# EAGLE board Nano Leonardo (EAGLE 6.2)
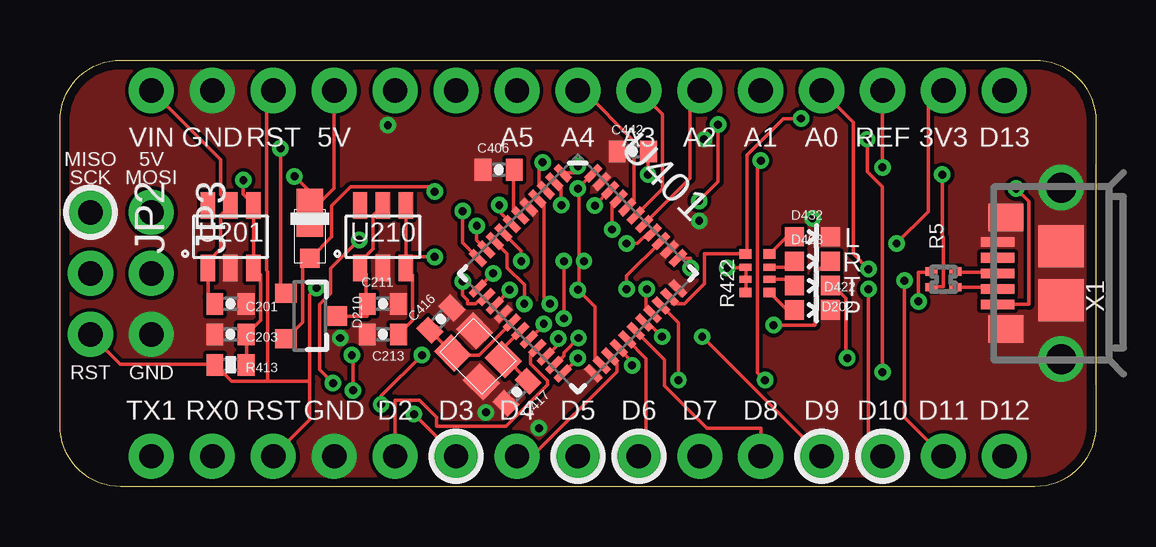
[diagram p0: board, top side]
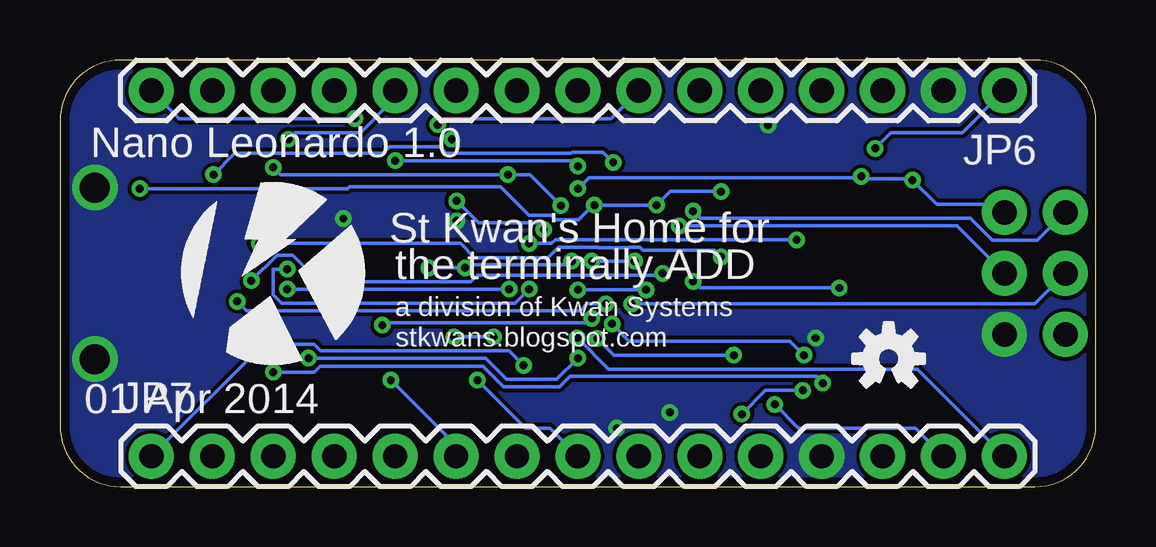
[diagram p1: board, bottom side, seen from below]

Size 43.18 x 17.78 mm. Coordinates in mm from the lower left corner, seen from the top.
Outline: 40.64,0 2.54,0 arc-90 0,2.54 0,15.24 arc-90 2.54,17.78 40.64,17.78 arc-90 43.18,15.24 43.18,2.54 arc-90 40.64,0
Copper layers (1*16): Top 0.0356mm / dielectric 1.5011mm / Bottom 0.0356mm
Design rules: minimum track width 6mil, minimum drill 13mil, track to track 6mil, track to pad 6mil, pad to pad 6mil, via to via 6mil, smd to smd 6mil, copper to edge 15mil, drill to drill 6mil, minimum pad ring 7mil, minimum via ring 7mil, stop-mask expansion 4mil, vias tented up to drill 0mil, thermal gap 10mil
Net classes: 0 default: width 0.152 mm, drill 0.33 mm, clearance 0.152 mm

## Footprints (pad centres in the part's own frame; a part is rotated, then mirrored left to right if it is on the bottom)
0402-CAP = smd 0.7 x 0.9: 1 -0.65,0; 2 0.65,0
MICROSMP = smd 0.8 x 0.8: A 0.9,0 | smd 2 x 1.1: K -1,0
LED-0603 = smd 0.8 x 0.8: A 0,-0.75; C 0,0.75
SOT-23-3 = smd 0.9 x 0.8: 1 -1,0.95; 2 -1,-0.95; 3 1.1,0
1X03_NO_SILK = drill 1.016 pad 1.88: 1 0,0; 2 2.54,0; 3 5.08,0
1X15 = drill 1.016 pad 1.88: 1 0,0; 2 2.54,0; 3 5.08,0; 4 7.62,0; 5 10.16,0; 6 12.7,0; 7 15.24,0; 8 17.78,0; 9 20.32,0; 10 22.86,0; 11 25.4,0; 12 27.94,0; 13 30.48,0; 14 33.02,0; 15 35.56,0
CRA02 = smd 0.35 x 0.5: 1 -0.325,-0.5; 2 0.325,-0.5; 3 0.325,0.5; 4 -0.325,0.5
0402-RES = smd 0.7 x 0.9: 1 -0.65,0; 2 0.65,0
CRA04 = smd 0.4 x 0.5: 1 -0.8,-0.5; 4 0.8,-0.5; 5 0.8,0.5; 8 -0.8,0.5 | smd 0.3 x 0.5: 2 -0.25,-0.5; 3 0.25,-0.5; 6 0.25,0.5; 7 -0.25,0.5
SOT-23-6 = smd 0.6 x 1.1: 1 -0.95,-1.3; 2 0,-1.3; 3 0.95,-1.3; 4 0.95,1.3; 5 0,1.3; 6 -0.95,1.3
QFN-44-NOPAD = smd 0.8 x 0.3: 1 -3.4,2.5; 2 -3.4,2; 3 -3.4,1.5; 4 -3.4,1; 5 -3.4,0.5; 6 -3.4,0; 7 -3.4,-0.5; 8 -3.4,-1; 9 -3.4,-1.5; 10 -3.4,-2; 11 -3.4,-2.5; 23 3.4,-2.5; 24 3.4,-2; 25 3.4,-1.5; 26 3.4,-1; 27 3.4,-0.5; 28 3.4,0; 29 3.4,0.5; 30 3.4,1; 31 3.4,1.5; 32 3.4,2; 33 3.4,2.5 | smd 0.3 x 0.8: 12 -2.5,-3.4; 13 -2,-3.4; 14 -1.5,-3.4; 15 -1,-3.4; 16 -0.5,-3.4; 17 0,-3.4; 18 0.5,-3.4; 19 1,-3.4; 20 1.5,-3.4; 21 2,-3.4; 22 2.5,-3.4; 34 2.5,3.4; 35 2,3.4; 36 1.5,3.4; 37 1,3.4; 38 0.5,3.4; 39 0,3.4; 40 -0.5,3.4; 41 -1,3.4; 42 -1.5,3.4; 43 -2,3.4; 44 -2.5,3.4
USB_MICROB_3075 = smd 0.4 x 1.4: 1 -1.3,4.1; 2 -0.65,4.1; 3 0,4.1; 4 0.65,4.1; 5 1.3,4.1 | smd 1.15 x 1.45: P$1 2.32,3.75; P$10 -2.32,3.75 | smd 1.75 x 1.9: P$2 1.125,1.45; P$8 -1.125,1.45 | drill 1.25 pad 1.9: P$3 -3.575,1.45; P$4 3.575,1.45
CRYSTAL_SMD_2MM_2_5MM = smd 1.2 x 1: 1 -0.85,-0.65; 2 0.85,-0.65; 3 0.85,0.65; 4 -0.85,0.65

## Placement (x,y rotation side)
C201  1uF  [0402-CAP]  7.11,7.62 0 top
C203  4.7uF  [0402-CAP]  7.11,6.35 180 top
C211  1uF  [0402-CAP]  13.46,7.62 0 top
C213  4.7uF  [0402-CAP]  13.46,6.35 180 top
C406  100nF  [0402-CAP]  18.29,13.21 0 top
C416  22pF  [0402-CAP]  15.88,6.99 45 top
C417  22pF  [0402-CAP]  19.05,3.94 225 top
C442  100nF  [0402-CAP]  23.88,13.97 0 top
D201  MSS1P6  [MICROSMP]  10.41,10.41 270 top
D202  GREEN  [LED-0603]  31.37,7.37 270 top
D210  DCC  [SOT-23-3]  10.41,7.11 0 top
D408  RED  [LED-0603]  31.37,9.4 270 top
D422  BLUE  [LED-0603]  31.37,8.38 270 top
D432  AMBER  [LED-0603]  31.37,10.41 270 top
JP2  [1X03_NO_SILK]  1.27,11.43 270 top
JP3  [1X03_NO_SILK]  3.81,11.43 270 top
JP6  [1X15]  3.81,16.51 180 bottom
JP7  [1X15]  39.37,1.27 0 bottom
R5  22  [CRA02]  36.83,8.64 90 top
R413  10K  [0402-RES]  7.11,5.08 0 top
R422  680  [CRA04]  29.08,8.89 90 top
U201  5V  [SOT-23-6]  7.11,10.41 0 top
U210  3.3V  [SOT-23-6]  13.46,10.41 0 top
U401  ATMEGA32U4  [QFN-44-NOPAD]  21.59,8.89 315 top
U$1  [KWAN_CIRCLE]  34.29,8.89 0 bottom
U$3  OSHW-LOGOS  [OSHW-LOGO-S]  8.64,5.33 0 bottom
X1  USB_MICROB_JSTGCT  [USB_MICROB_3075]  43.18,8.89 90 top
Y1  16MHz  [CRYSTAL_SMD_2MM_2_5MM]  17.42,5.44 135 top

## Library data of the parts
C201 C211 = SparkFun; DIGIKEY: 445-1415-1-ND
C203 C213 = SparkFun; DIGIKEY: 445-7395-1-ND
C406 C416 C417 C442 R413 U$3 = SparkFun
D201 = KwanSystems; DIGIKEY: MSS1P6-M3/89AGICT-ND
D202 = SparkFun; LED_COLOR_3D50: Green; LED_TRANS_3D50: 0.500000
D210 X1 = KwanSystems; LOGO_3D50: NOLOGO
D408 = SparkFun; LED_COLOR_3D50: Red; LED_TRANS_3D50: 0.500000
D422 = SparkFun; LED_COLOR_3D50: Blue; LED_TRANS_3D50: 0.500000
D432 = SparkFun; LED_COLOR_3D50: Yellow; LED_TRANS_3D50: 0.500000
JP2 JP3 = SparkFun-Connectors; HEADER_INVERT_3D50: 1; HEADER_TYPE_3D50: 1
JP6 JP7 = SparkFun-Connectors; HEADER_INVERT_3D50: 0; HEADER_TYPE_3D50: 1
R5 R422 U$1 Y1 = KwanSystems
U201 U210 = KwanSystems; DIGIKEY: MAX8881EUT50+TCT-ND
U401 = SparkFun; LOGO_3D50: NOLOGO

## Nets
3V3: C213.1 JP6.14 U210.3 U210.4
A0: JP6.12 U401.36
A1: JP6.11 U401.37
A2: JP6.10 U401.38
A3: JP6.9 U401.39
A4: JP6.8 U401.40
A5: JP6.7 U401.41
AREF: C442.2 JP6.13 U401.42
D2: JP7.11 U401.19
D3: JP7.10 U401.18
D4: JP7.9 U401.25
D5: JP7.8 U401.31
D6: JP7.7 U401.27
D7: JP7.6 U401.1
D8: JP7.5 U401.28
D9: JP7.4 U401.29
D10: JP7.3 U401.30
D11: JP7.2 U401.12
D12: JP7.1 U401.26
D13: JP6.15 R422.5 U401.32
D17: D408.C U401.8
D+: R5.3 U401.4
D-: R5.4 U401.3
GND [vcc]: C201.2 C203.2 C211.2 C213.2 C406.1 C416.2 C417.2 C442.1 D202.C D432.C JP3.3 JP6.2 JP7.12 U201.2 U210.2 U401.5 U401.15 U401.23 U401.33 U401.35 U401.43 X1.5 X1.P$1 X1.P$2 X1.P$3 X1.P$4 X1.P$8 X1.P$10 Y1.2 Y1.4
MISO: JP2.1 U401.11
MOSI: JP3.2 U401.10
N$1: D422.A R422.2
N$2: D408.A R422.3
N$3: D432.A R422.4
N$4: C406.2 U401.6
N$6: R5.1 X1.2
N$8: R5.2 X1.3
N$38: D202.A R422.1
RESET: JP2.3 JP6.3 JP7.13 R413.1 U401.13
RXI: JP7.14 U401.20
SCK: JP2.2 U401.9
TXLED: D422.C U401.22
TXO: JP7.15 U401.21
V3.3SUPPLY: C211.1 D210.3 U210.1 U210.5
VBUS: D201.A D210.2 U401.2 U401.7 X1.1
VCC: C203.1 D201.K JP3.1 JP6.4 R413.2 R422.6 R422.7 R422.8 U201.3 U201.4 U401.14 U401.24 U401.34 U401.44
VIN: C201.1 D210.1 JP6.1 U201.1 U201.5
XTAL1: C417.1 U401.17 Y1.1
XTAL2: C416.1 U401.16 Y1.3

## Tracks (layer width: path | path; a pad name or v marks a point on that pad's centre or on a via)
3V3  (via drill 0.33)
  Top 0.152: C213.1 14.12,6.35 14.71,6.93 14.71,8.81 14.43,9.09 U210.3 | U210.4 14.43,11.71 14.43,9.17 U210.3 | v15.62,9.58 14.48,9.58 U210.3 | v34.87,10.13 36.2,11.46 36.2,15.88 JP6.14
  Bottom 0.152: v15.62,9.58 15.9,9.86 18.87,9.86 19,9.98 19.46,9.98 19.48,9.96 20.75,9.96 20.78,9.98 22.4,9.98 22.84,9.55 25.91,9.55 26.49,10.13 v34.87,10.13
A0  (via drill 0.33)
  Top 0.152: v23.62,8.23 23.62,8.79 25.04,10.21 U401.36 | v33.71,9.07 33.07,9.7 33.07,15.19 JP6.12
  Bottom 0.152: v23.62,8.23 24.21,7.64 33.93,7.64 34.29,8 34.29,9.07 v33.71,9.07
A1  (via drill 0.33)
  Top 0.152: v23.62,10.13 24.08,10.13 24.51,10.57 24.69,10.57 U401.37 | v12.47,10.29 11.28,9.09 11.28,8.05 10.82,7.59 10.82,4.88 v11.38,4.32 | v34.29,4.78 34.29,12.5 33.66,13.13 v33.66,14.48
  Bottom 0.152: v23.62,10.13 22.68,10.13 22.53,10.29 v12.47,10.29 | v11.38,4.32 11.66,4.6 21.92,4.6 22.35,4.17 24.69,4.17 25.55,5.03 32.33,5.03 32.59,4.78 v34.29,4.78 | v33.66,14.48 33.38,14.76 30.66,14.76 29.21,16.2 JP6.11
A2
  Top 0.152: JP6.10 26.26,16.1 26.26,12.85 U401.38
A3
  Top 0.152: U401.39 25.12,12.42 25.12,15.52 JP6.9
A4
  Top 0.152: JP6.8 21.82,16.51 23.93,14.4 23.93,11.94 U401.40
A5  (via drill 0.33)
  Top 0.152: v23.01,10.72 23.01,11.73 23.27,11.99 U401.41 | v26.64,11.91 27.43,12.7 v27.43,15.09
  Bottom 0.152: v23.01,10.72 23.29,11 25.73,11 v26.64,11.91 | v27.43,15.09 27.18,15.34 20.22,15.34 JP6.7
AREF  (via drill 0.33)
  Top 0.152: v22.3,11.71 22.3,11.73 22.91,12.34 U401.42 | v24.51,13.01 24.51,13.97 C442.2 | JP6.13 v34.29,13.31
  Bottom 0.152: v22.3,11.71 23.6,13.01 v24.51,13.01 33.98,13.01 v34.29,13.31
D2
  Top 0.152: JP7.11 13.97,3.61 14.99,3.61 15.7,2.9 15.7,2.52 18.59,2.52 20.32,4.24 20.32,4.42 19.61,5.13 19.61,5.49 19.89,5.77 U401.19
D3  (via drill 0.33)
  Top 0.152: v20.17,6.78 20.17,6.76 19.56,6.15 U401.18 | v12.17,5.49 12.22,5.44 v12.22,4.01 | JP7.10 v14.76,3.02
  Bottom 0.152: v20.17,6.78 19.46,6.07 12.75,6.07 v12.17,5.49 | v12.22,4.01 13.77,4.01 v14.76,3.02
D4
  Top 0.152: JP7.9 19.68,1.27 23.22,4.8 23.22,5.13 22.94,5.41 U401.25
D5  (via drill 0.33)
  Top 0.152: v25.78,4.45 25.78,6.83 25.07,7.54 U401.31
  Bottom 0.152: v25.78,4.45 23.77,2.44 22.76,2.44 JP7.8
D6
  Top 0.152: JP7.7 24.43,1.57 24.43,5.33 U401.27
D7  (via drill 0.33)
  Top 0.152: v21.59,13.36 21.59,13.08 20.95,13.08 U401.1 | v29.21,13.59 29.08,13.46 29.08,4.75 v29.39,4.45
  Bottom 0.152: v21.59,13.36 21.82,13.59 v29.21,13.59 | v29.39,4.45 26.67,1.73 JP7.6
D8
  Top 0.152: JP7.5 29.21,2.44 26.98,2.44 25.2,4.22 25.2,5.28 24,6.48 U401.28
D9  (via drill 0.33)
  Top 0.152: v25.09,6.25 24.51,6.83 U401.29 | JP7.4 v26.77,6.25
  Bottom 0.152: v26.77,6.25 v25.09,6.25
D10  (via drill 0.33)
  Top 0.152: v24.46,8.23 24.43,8.2 24.43,7.47 24.69,7.21 U401.30 | v33.71,8.23 33.71,1.85 JP7.3
  Bottom 0.152: v33.71,8.23 v24.46,8.23
D11  (via drill 0.33)
  Top 0.152: v18.06,8.89 U401.12 | v35.2,8.59 35.2,2.9 JP7.2
  Bottom 0.152: v18.06,8.89 18.14,8.81 25.78,8.81 26.06,8.53 32.36,8.53 33.48,9.65 34.14,9.65 v35.2,8.59
D12  (via drill 0.33)
  Top 0.152: v23.85,5.05 23.85,5.21 23.29,5.77 U401.26
  Bottom 0.152: v23.85,5.05 24.46,5.66 32.31,5.66 32.59,5.94 34.7,5.94 JP7.1
D13  (via drill 0.33)
  Top 0.152: U401.32 25.43,7.9 25.53,7.8 25.53,7.62 26.04,7.62 26.87,8.46 26.87,9.7 28.57,9.7 R422.5 28.57,9.78 28.63,9.83 28.63,13.82 30.15,15.34 v30.89,15.34
  Bottom 0.152: v30.89,15.34 38.2,15.34 JP6.15
D17  (via drill 0.33)
  Top 0.152: v19.23,9.4 19.23,9.83 18.49,10.57 U401.8 | v21.01,7.01 v21.01,9.4 | v29.74,6.73 31.47,6.73 31.47,8.87 32,9.4 D408.C
  Bottom 0.152: v21.01,9.4 v19.23,9.4 | v21.01,7.01 21.18,6.83 29.64,6.83 v29.74,6.73
D+  (via drill 0.33)
  Top 0.152: v35.79,7.72 35.79,8.94 36.32,8.94 R5.3 | v20.42,7.62 20.17,7.87 20.17,11.73 19.91,11.99 U401.4
  Bottom 0.152: v35.79,7.72 35.41,7.34 21.49,7.34 21.21,7.62 v20.42,7.62
D-  (via drill 0.33)
  Top 0.152: v36.78,13.01 36.78,10.44 36.83,10.39 36.83,8.33 36.35,8.33 R5.4 | v20.12,13.51 19.96,13.36 19.96,12.65 20.24,12.37 U401.3
  Bottom 0.152: v36.78,13.01 35.89,13.89 29.72,13.89 29.44,14.17 27.36,14.17 27.08,13.89 21.87,13.89 21.82,13.95 20.55,13.95 v20.12,13.51
GND  (via drill 0.33)
  other vias: 19.96,2.44 11.68,6.2 26.64,11.07 31.37,11.18 13.67,15.06 26.85,14.48 17.75,3.1
  pour Top (no thermals): 40.64,0 2.54,0 arc-90 0,2.54 0,15.24 arc-90 2.54,17.78 40.64,17.78 arc-90 43.18,15.24 43.18,2.54 arc-90
  pour Bottom (no thermals): 40.64,0 2.54,0 arc-90 0,2.54 0,15.24 arc-90 2.54,17.78 40.64,17.78 arc-90 43.18,15.24 43.18,2.54 arc-90
MISO  (via drill 0.33)
  Top 0.152: v16.79,11.48 16.79,10.16 17.4,9.55 U401.11
  Bottom 0.152: v16.79,11.48 16.48,11.18 5.23,11.18 4.32,10.26 2.44,10.26 JP2.1
MOSI  (via drill 0.33)
  Top 0.152: v17.37,10.87 17.37,10.26 17.75,9.88 U401.10
  Bottom 0.152: v17.37,10.87 5.79,10.87 JP3.2
N$1
  Top 0.152: R422.2 29.59,8.64 30.61,8.64 30.61,8.38 D422.A
N$2
  Top 0.152: R422.3 29.59,9.14 30.61,9.14 30.61,9.4 D408.A
N$3
  Top 0.152: D432.A 30.3,10.41 29.59,9.7 R422.4
N$4
  Top 0.152: U401.6 19.18,11.3 18.9,11.58 18.9,13.18 18.92,13.21 C406.2
N$6
  Top 0.152: R5.1 39.06,8.31 39.06,8.26 X1.2
N$8
  Top 0.152: R5.2 37.34,8.94 39.06,8.94 39.06,8.89 X1.3
N$38
  Top 0.152: D202.A 30.3,7.37 29.59,8.08 R422.1
RESET  (via drill 0.33)
  Top 0.152: v16.79,8.56 16.79,7.98 16.99,7.77 16.99,7.62 17.32,7.62 17.6,7.9 17.75,7.9 U401.13 | v10.69,8.28 10.41,8 10.41,4.39 | 10.41,4.39 10.41,2.79 JP7.13 | 10.41,4.39 8.66,4.39 | 8.66,4.39 7.16,4.39 6.48,5.08 R413.1 6.4,5.11 2.52,5.11 JP2.3 | JP6.3 8.61,16.23 8.61,9.02 8.66,8.97 8.66,4.39
  Bottom 0.152: v16.79,8.56 16.51,8.28 v10.69,8.28
RXI  (via drill 0.33)
  Top 0.152: v20.78,6.17 20.78,5.94 20.27,5.44 U401.20 | v15.09,5.49 13.39,3.79 v13.39,3.43
  Bottom 0.152: v20.78,6.17 20.09,5.49 v15.09,5.49 | v13.39,3.43 12.39,2.44 7.52,2.44 JP7.14
SCK  (via drill 0.33)
  Top 0.152: v19.36,7.62 19.36,8.41 18.64,9.12 18.64,9.7 18.14,10.21 U401.9
  Bottom 0.152: v19.36,7.62 2.54,7.62 JP2.2
TXLED  (via drill 0.33)
  Top 0.152: v21.59,5.36 U401.22 | v32.82,5.36 32.77,5.41 32.77,7.85 32.23,8.38 D422.C
  Bottom 0.152: v21.59,5.36 22.48,4.47 24.56,4.47 25.45,5.36 v32.82,5.36
TXO  (via drill 0.33)
  Top 0.152: v21.61,6.2 21.01,5.59 21.01,5.46 20.62,5.08 U401.21
  Bottom 0.152: v21.61,6.2 20.32,4.9 7.44,4.9 JP7.15
V3.3SUPPLY
  Top 0.152: D210.3 12.8,7.11 C211.1 12.75,7.67 12.75,8.87 12.52,9.09 U210.1 12.55,9.17 12.55,9.4 13.06,9.91 13.06,11.3 U210.5
VBUS  (via drill 0.33)
  Top 0.152: D210.2 9.42,6.17 10.11,6.86 10.11,9.2 D201.A 10.46,9.55 11.33,10.41 11.33,11.71 12.12,12.5 15.62,12.5 v15.62,12.29 | v18.31,11.73 18.31,11.46 U401.7 | v20.9,11.73 20.88,11.76 20.88,12.45 20.62,12.7 U401.2 | v39.85,12.42 40.39,11.89 40.39,7.59 39.09,7.59 X1.1
  Bottom 0.152: v39.85,12.42 31.19,12.42 31.11,12.5 24.82,12.5 23.62,11.3 22.71,11.3 22.53,11.12 21.57,11.12 21.01,11.68 20.95,11.68 v20.9,11.73 v18.31,11.73 17.73,12.32 15.65,12.32 v15.62,12.29
VCC  (via drill 0.33)
  Top 0.152: R422.8 28.6,8.1 28.6,8.64 R422.7 28.6,8.71 28.6,9.12 R422.6 28.52,9.12 v27.81,9.12 | v26.29,9.12 26.29,9.53 25.78,9.53 U401.34 | v18.75,8.2 18.75,8.18 18.14,7.57 U401.14 | U401.24 22.55,5.08 22.3,5.33 22.3,7.49 v21.59,8.2 21.64,8.26 21.64,9.4 | 21.64,12.47 U401.44 | 21.64,9.4 21.64,12.47 | 21.64,9.4 v21.84,9.4 | JP6.4 11.43,12.45 10.41,11.43 D201.K 10.79,11.91 v9.78,12.93 | R413.2 7.77,5.08 7.77,6.35 C203.1 7.82,6.4 8.36,6.93 8.36,8.84 8.13,9.07 U201.3 8.08,9.12 8.08,11.71 U201.4 8.05,11.79 7.64,12.19 v7.64,12.78 | v21.59,12.42 21.64,12.47
  Bottom 0.152: v27.81,9.12 v26.29,9.12 26.16,9.25 22,9.25 v21.84,9.4 | v21.59,8.2 v18.75,8.2 | JP3.1 4.14,11.76 6.63,11.76 v7.64,12.78 7.7,12.83 9.68,12.83 v9.78,12.93 9.83,12.88 21.13,12.88 v21.59,12.42
VIN  (via drill 0.33)
  Top 0.152: C201.1 6.17,7.9 6.17,9.09 U201.1 6.2,9.17 6.2,9.4 6.71,9.91 6.71,11.3 U201.5 7.09,11.79 6.71,12.17 6.71,13.61 JP6.1 | v9.2,14.1 9.2,8.28 9.4,8.08 D210.1
  Bottom 0.152: v9.2,14.1 8.53,14.76 5.56,14.76 JP6.1
XTAL1
  Top 0.152: U401.17 18.49,5.79 18.49,5.31 Y1.1 18.54,5.38 19.51,4.42 C417.1
XTAL2
  Top 0.152: U401.16 17.48,5.49 16.38,5.49 16.38,5.56 Y1.3 16.31,5.61 15.42,6.5 C416.1

## Text on the board
tPlace: VIN | GND | RST | 5V | A5 | A4 | A3 | A2 | A1 | A0 | REF | 3V3 | D13 | MISO | 5V | SCK | MOSI | L | R | T | P | RST | GND | TX1 | RX0 | RST | GND | D2 | D3 | D4 | D5 | D6 | D7 | D8 | D9 | D10 | D11 | D12
bPlace: Nano Leonardo 1.0 | St Kwan's Home for | the terminally ADD | a division of Kwan Systems | stkwans.blogspot.com | 01 Apr 2014
tValues: Valid combinations: | 3.3V Reg / 8MHz | 5V Reg / 16MHz | Mark back accordingly